# Altium PCB IR-Sensor.PcbDoc
Units mm, origin at the board's own origin, x right, y up, seen from the top; angles counter-clockwise.
Board outline 100 x 60 mm, 2 copper layers (Top Layer, Bottom Layer), stack 1.671 mm thick; 59 components, 34 nets, 161 pads, 262 vias.
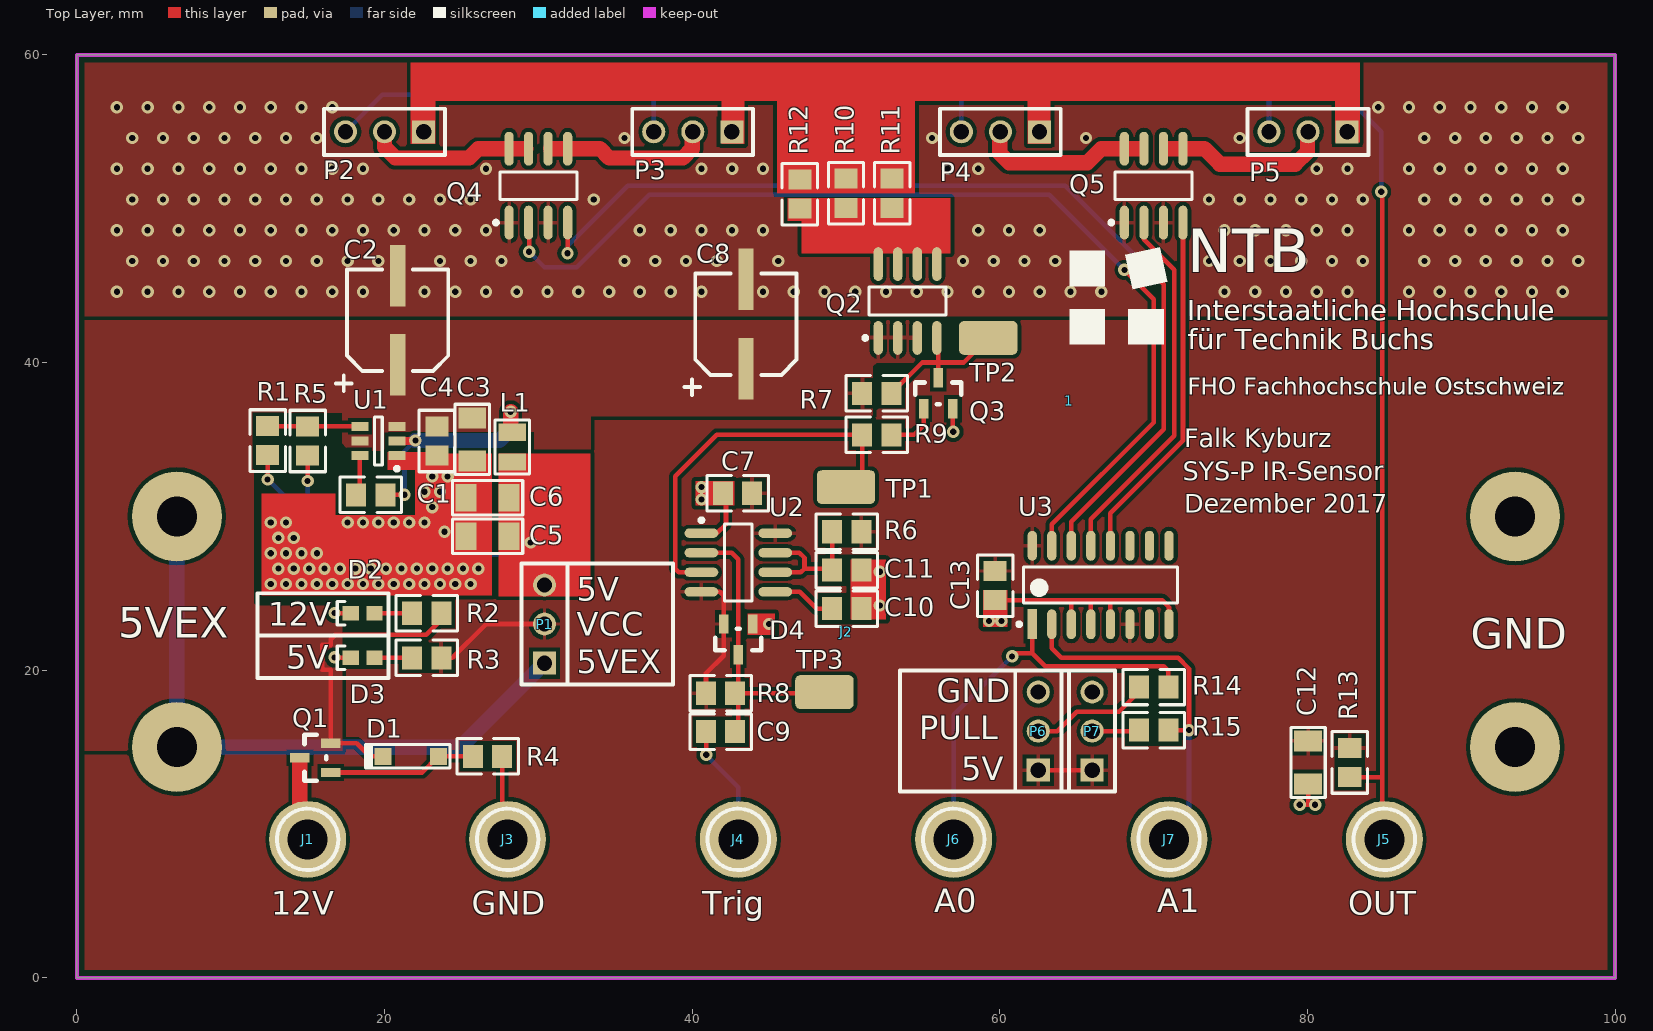
[diagram p0: Top Layer view]
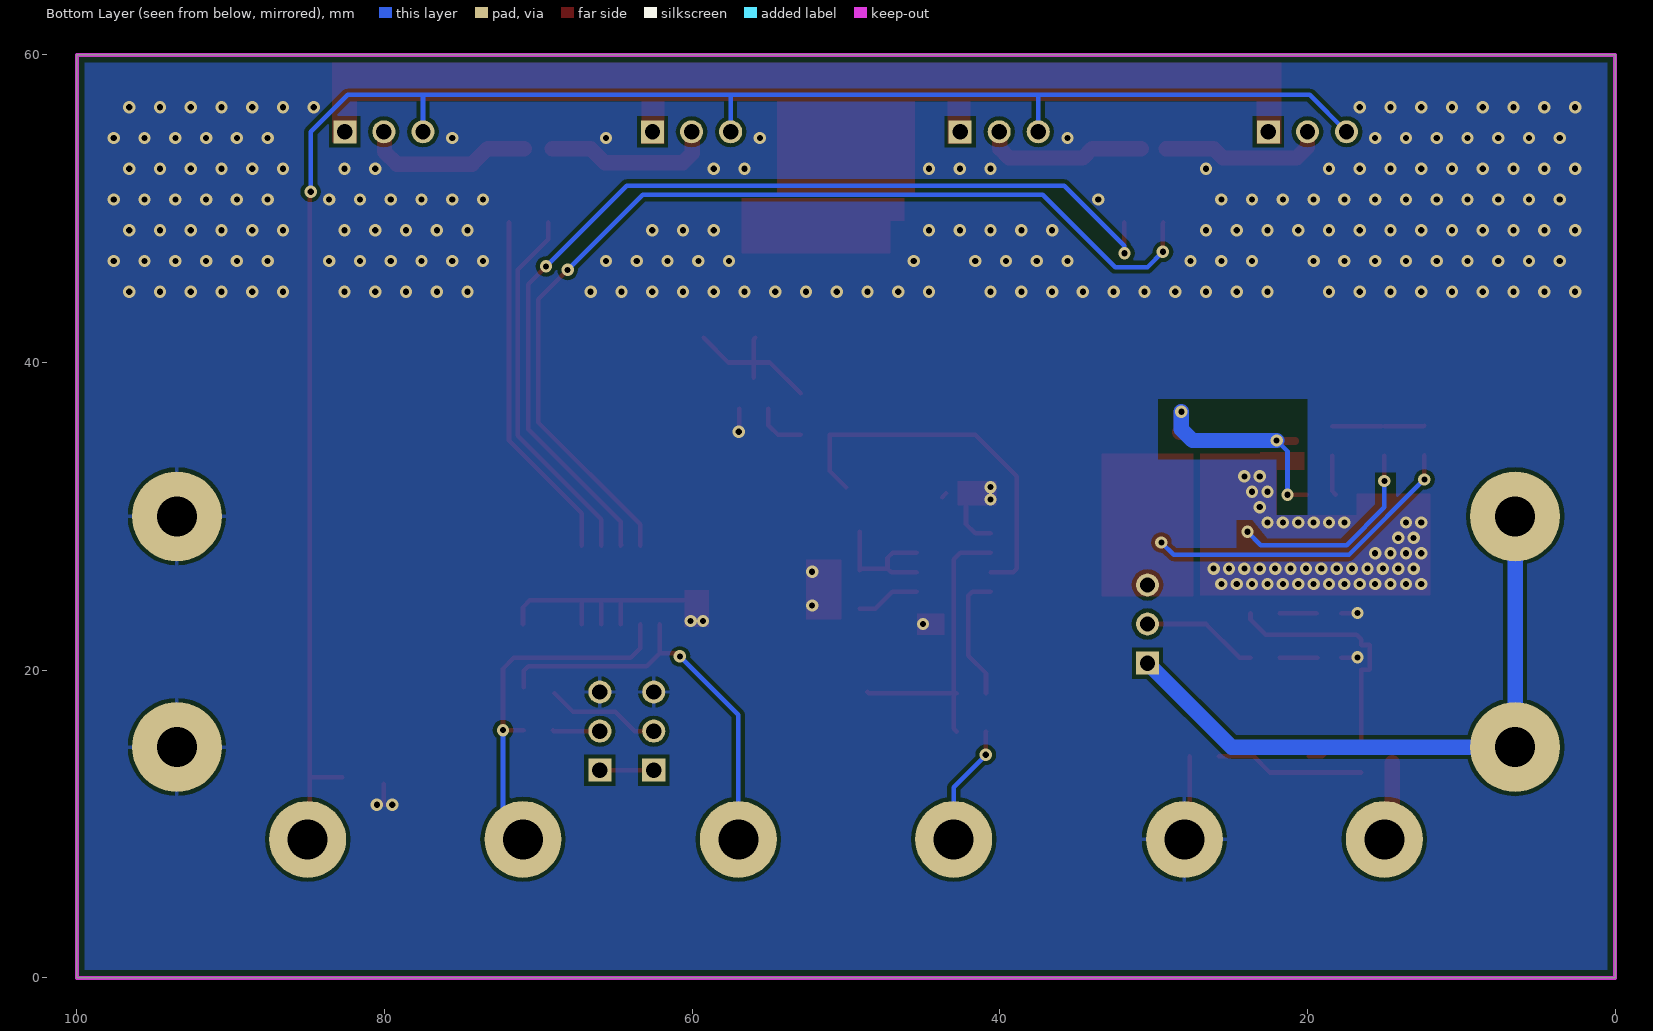
[diagram p1: Bottom Layer view, seen from below]
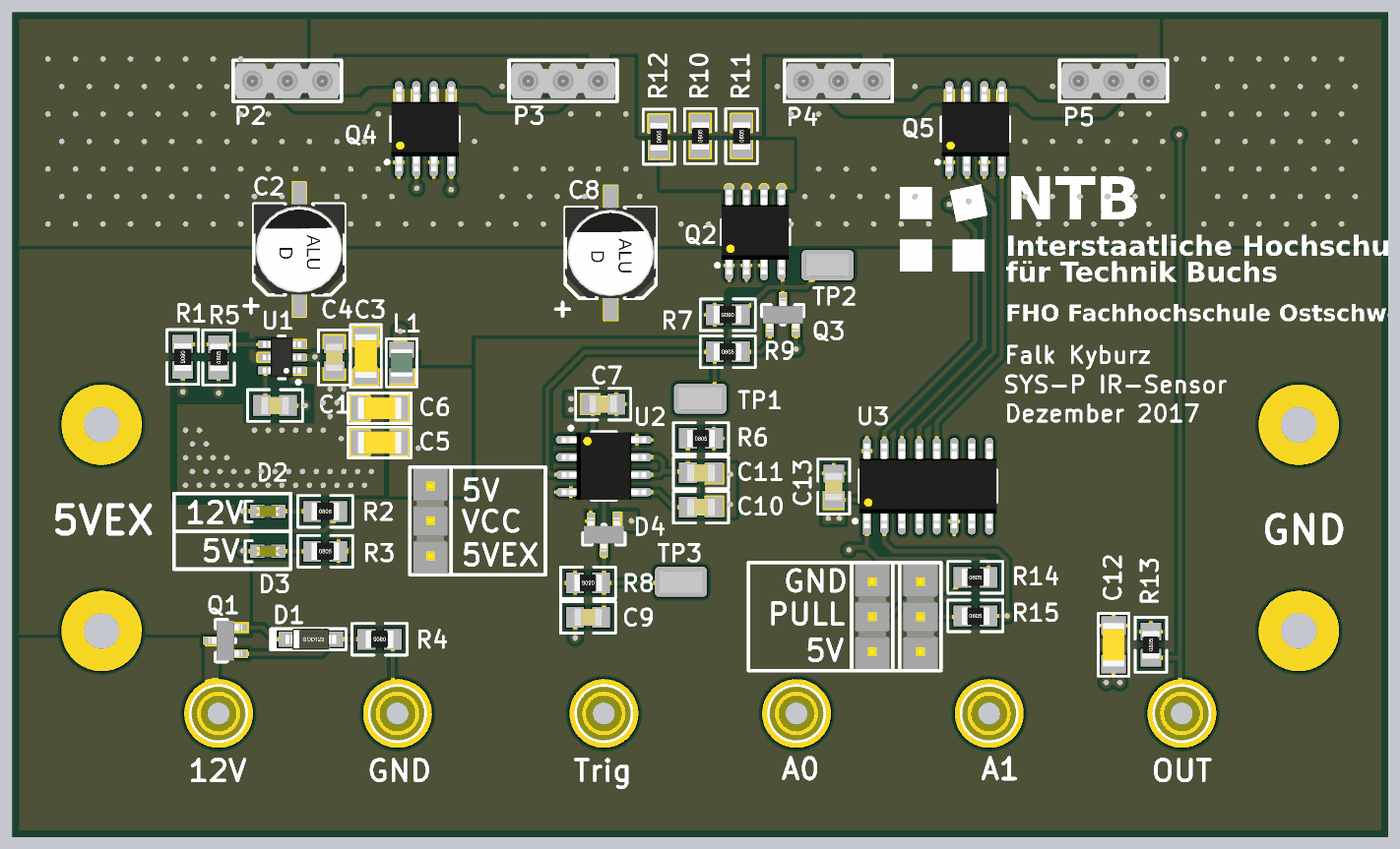
[diagram p2: 3D render of the assembled board from above, using the file's embedded part models]

## Layer stack, top to bottom
Top Solder: solder mask 0.0102, Solder Resist, Dk 3.5
Top Layer: signal copper 0.035
Dielectric1: core 1.6, FR-4, Dk 4.2
Bottom Layer: signal copper 0.0356
Bottom Solder: solder mask 0.0102, Solder Resist, Dk 3.5

## Board outline
0,0 100,0 100,60 0,60

## Design rules (kind name [scope] priority, off if disabled: settings)
BoardOutlineClearance [All] p1: gap=0.5 ignorepadtopadclearanceinfootprint=FALSE
Clearance PolygonMidLayer [InPolygon vs Not ( OnLayer('MidLayer1') OR OnLayer('MidLayer2')  )] p1: gap=0.254 ignorepadtopadclearanceinfootprint=FALSE except(0: Arc-Hole Track-Hole SMDPad-Hole THPad-Hole Via-Hole Fill-Hole Poly-Hole Region-Hole Text-Hole) // Polygon Clearance on the MidLayer
Clearance PolygonTopBottomLayer [InPolygon vs OnLayer('Top Layer') OR OnLayer('Bottom Layer')] p2: gap=0.254 ignorepadtopadclearanceinfootprint=FALSE except(0: Arc-Hole Track-Hole SMDPad-Hole THPad-Hole Via-Hole Fill-Hole Poly-Hole Region-Hole Text-Hole) // Polygon Clearance on the TopLayer and BottomLayer
Clearance [All] p3: gap=0.254 ignorepadtopadclearanceinfootprint=FALSE except(0: Arc-Hole Track-Hole SMDPad-Hole THPad-Hole Via-Hole Fill-Hole Poly-Hole Region-Hole Text-Hole)
ComponentClearance "Schematic Component Clearance Constraint" [InComponent('J2')] p1: gap=0 collisioncheckmode=3 verticalgap=0 showdistances=FALSE
ComponentClearance [All] p2: gap=0.254 collisioncheckmode=3 verticalgap=0.254 showdistances=FALSE
FabricationTestPointUsage TestPointUsage [All] p1 off: valid=0 allowmultiple=FALSE
FabricationTestpoint Testpoint [All] p1 off: side=3 testpointundercomponent=TRUE minsize=1.016 maxsize=2.54 preferedsize=1.524 minholesize=0 maxholesize=1.016 preferedholesize=0.813 testpointgrid=0.025 allowsidetop=TRUE allowsidebottom=TRUE usegrid=TRUE gridtolerance=0
FanoutControl Fanout_BGA [IsBGA] p1 off: bgadir=Out bgaviamode=Centered fanoutstyle=Auto fanoutdirection=Alternating viagrid=0.025 // Fanout_BGA (Default Rule)
FanoutControl Fanout_LCC [IsLCC] p2 off: bgadir=Out bgaviamode=Centered fanoutstyle=Auto fanoutdirection=Alternating viagrid=0.025 // Fanout_LCC (Default Rule)
FanoutControl Fanout_SOIC [IsSOIC] p3 off: bgadir=Out bgaviamode=Centered fanoutstyle=Auto fanoutdirection=Alternating viagrid=0.025 // Fanout_SOIC (Default Rule)
FanoutControl Fanout_Small [(CompPinCount < 5)] p4 off: bgadir=Out bgaviamode=Centered fanoutstyle=Auto fanoutdirection=OutThenIn viagrid=0.025 // Fanout_Small (Default Rule)
FanoutControl Fanout_Default [All] p5 off: bgadir=Out bgaviamode=Centered fanoutstyle=Auto fanoutdirection=Alternating viagrid=0.025 // Fanout_Default (Default Rule)
Height [All] p1 off: minheight=0 maxheight=25.4 prefheight=12.7
HoleSize HoleType [IsPad And HasSquareHole] p1: absolutevalues=TRUE maxlimit=0 minlimit=0 maxpercent=80.000 minpercent=20.000 // Find Square Holes
HoleSize [All] p2: absolutevalues=TRUE maxlimit=5 minlimit=0.4 maxpercent=80.000 minpercent=20.000
LayerPairs [All] p1 off: enforce=TRUE
MinimumAnnularRing "Minimum Annular Ring" [All] p1: minimumring=0.2
PolygonConnect Via [isVia] p1: connectstyle=Direct reliefconductorwidth=0.254 reliefentries=4 polygonreliefangle="90 Angle" airgapwidth=0.254
PolygonConnect PolygonConnect_Full [InComponentClass('Connect_Full')] p2: connectstyle=Direct reliefconductorwidth=0.254 reliefentries=4 polygonreliefangle="90 Angle" airgapwidth=0.254
PolygonConnect PolygonConnect_Full_Simple [InComponent('C3','C4')] p3: connectstyle=Direct reliefconductorwidth=0.254 reliefentries=4 polygonreliefangle="90 Angle" airgapwidth=0.254
PolygonConnect PolygonConnect_Relief [All] p4: connectstyle=Relief reliefconductorwidth=0.254 reliefentries=4 polygonreliefangle="90 Angle" airgapwidth=0.254
RoutingCorners [All] p1 off: cornerstyle=45-Degree minsetback=2.54 maxsetback=2.54
RoutingLayers [All] p1 off: top layer_v5=TRUE bottom layer_v5=TRUE
RoutingPriority [All] p1 off: routingpriority=0
RoutingTopology [All] p1 off: topology=Shortest
RoutingVias [All] p1: holewidth=0.4 width=0.8 viastyle="Through Hole" minholewidth=0.3 minwidth=0.7 maxholewidth=2 maxwidth=3.4
ShortCircuit [All] p1 off: allowed=FALSE
SignalStimulus "#Version Information" [All] p1 off: kind=1 level=0 starttime=10.00n stoptime=60.00n periodtime=100.00n // Version 1-1 from 2010-11-01
SilkToSolderMaskClearance SilkscreenOverComponentPads [IsPad] p1: minsilkscreentomaskgap=0.254 clearancetoexposedcopper=TRUE
SolderMaskExpansion [All] p1 off: expansion=0.1
Width [All] p1: maxlimit=2.54 minlimit=0.254 preferedwidth=0.254 minimp=50.000000 maximp=50.000000 favimp=50.000000
13 further rules are at their usual default settings.

## Classes and differential pairs
component class Connect_Full1: C3 C4
component class Connect_Full: C2 C5 C6 C8 L1 Q1 U1

## Components (designator, comment, footprint, x,y, rotation, side; value= is the part's Value field where it differs from the comment)
1 "NTB Logo Medium" "NTB Logo Medium" 64.5,37.5 r0 top
C1 "100nF" CAP-0805[2012] 19.1,31.4 r0 top
C2 "AVE476M16D16T-F" "CDE_CAP AVE CODE D_H" 20.85,42.75 r0 top value=47uF
C3 "10uF" CAP-1206[3216] 25.7,35 r270 top
C4 "100nF" CAP-0805[2012] 23.4,34.9 r270 top
C5 "22uF" CAP-1206[3216] 26.7,28.7 r180 top
C6 "22uF" CAP-1206[3216] 26.7,31.2 r180 top
C7 "100nF" CAP-0805[2012] 42.95,31.5 r180 top
C8 "AVE476M16D16T-F" "CDE_CAP AVE CODE D_H" 43.5,42.5 r0 top value=47uF
C9 "1nF" CAP-0805[2012] 41.85,16 r0 top
C10 "100nF" CAP-0805[2012] 50.05,24 r0 top
C11 "10nF" CAP-0805[2012] 50.05,26.5 r0 top
C12 "10uF" CAP-1206[3216] 80.04,14 r270 top
C13 "100nF" CAP-0805[2012] 59.7,25.5 r270 top
D1 "BZT52C4V7" SOD-123 21.7,14.4 r0 top
D2 "LTST-C190GKT" "LED 0603 green" 18.575,23.7 r0 top
D3 "LTST-C190GKT" "LED 0603 green" 18.575,20.8 r0 top
D4 "BAT721S" SOT-23 43,22 r0 top
J1 "12V" "Laborbuchse 2mm" 15,9 r0 top
J2 "ExpBoardSmall" EXPBOARDCON 6.5,30 r0 top locked
J3 "GND" "Laborbuchse 2mm" 28,9 r0 top
J4 "Trig" "Laborbuchse 2mm" 43,9 r0 top
J5 "OUT" "Laborbuchse 2mm" 85,9 r0 top
J6 "A0" "Laborbuchse 2mm" 57,9 r0 top
J7 "A1" "Laborbuchse 2mm" 71,9 r0 top
L1 "CKP2016 4R7M-T" IND-0806 28.3,34.5 r270 top
P1 "3 Pin Header" "3PIN HEADER 2.54MM" 30.4,20.48 r270 top
P2 "3 Pin Header Buchse" "3PIN HEADER SOCKET 2.54MM" 22.52,55 r0 top
P3 "3 Pin Header Buchse" "3PIN HEADER SOCKET 2.54MM" 42.56,55 r0 top
P4 "3 Pin Header Buchse" "3PIN HEADER SOCKET 2.54MM" 62.56,55 r0 top
P5 "3 Pin Header Buchse" "3PIN HEADER SOCKET 2.54MM" 82.56,55 r0 top
P6 "3 Pin Header" "3PIN HEADER 2.54MM" 62.5,13.52 r270 top
P7 "3 Pin Header" "3PIN HEADER 2.54MM" 66,13.52 r270 top
Q1 "STR1P2UH7" SOT-23 15.5,14.3 r270 top
Q2 "IRF7204PBF" SOIC-8 54,44 r90 top
Q3 "BC846B-7-F" SOT-23 56,38 r180 top
Q4 "IRF7311PBF" SOIC-8 30,51.5 r90 top
Q5 "IRF7311PBF" SOIC-8 70,51.5 r90 top
R1 "56k" RES-0805[2012] 12.4,34.929 r270 top
R2 "TBD" RES-0805[2012] 22.75,23.7 r0 top
R3 "TBD" RES-0805[2012] 22.75,20.8 r0 top
R4 "10k" RES-0805[2012] 26.7,14.4 r180 top
R5 "10k" RES-0805[2012] 15,34.9 r90 top
R6 "16k" RES-0805[2012] 50.05,29 r0 top
R7 "1k" RES-0805[2012] 52,38 r180 top
R8 "4k3" RES-0805[2012] 41.85,18.5 r180 top
R9 "10k" RES-0805[2012] 52,35.3 r0 top
R10 "10R 1% 0805(2012)" RES-0805[2012] 50,51 r90 top value=33R
R11 "10R 1% 0805(2012)" RES-0805[2012] 53,51 r90 top value=33R
R12 "10R 1% 0805(2012)" RES-0805[2012] 47,50.95 r90 top value=33R
R13 "510R" RES-0805[2012] 82.75,14 r90 top
R14 "10k" RES-0805[2012] 70,18.9 r0 top
R15 "10k" RES-0805[2012] 70,16.1 r0 top
TP1 "Testpoint SMD 1206" TP-SMD-1206 50,31.9 r0 top
TP2 "Testpoint SMD 1206" TP-SMD-1206 59.25,41.6 r0 top
TP3 "Testpoint SMD 1206" TP-SMD-1206 48.6,18.58 r180 top
U1 "TPS562209" SOT-23-6 19.6,34.9 r180 top
U2 "ICM7555" SOIC-8 43,27 r0 top
U3 "74HC237D,653" SOIC-16 66.553,25.538 r90 top

## Footprints (in the part's own frame and the unit in brackets; to place one, negate y for a bottom-side part, rotate by r counter-clockwise, add the part's x,y. Pads: shape width x height; smd on the part's side, far side on the other; paste and mask are expansions set on the pad)
"3PIN HEADER 2.54MM" [mm]
  rect 1.5x1.5 hole 1 paste-0.002 mask+0.07: 1(0.02,0)
  round 1.5 hole 1 paste-0.002 mask+0.07: 2(-2.52,0) 3(-5.06,0)
  silkscreen extent -6.46,-1.5 1.4,1.5, body extent -6.33,-1.24 1.29,1.24, height 8.38
"3PIN HEADER SOCKET 2.54MM" [mm]
  rect 1.5x1.5 hole 1 paste-0.002 mask+0.07: 1(0.02,0)
  round 1.5 hole 1 paste-0.002 mask+0.07: 2(-2.52,0) 3(-5.06,0)
  silkscreen extent -6.46,-1.5 1.4,1.5, body extent -6.33,-1.27 1.29,1.27, height 3.8
CAP-0805[2012] [mm]
  rect 1.3x1.5 smd: 1(-0.95,0) 2(0.95,0)
  silkscreen extent -2,-1.15 2,1.15, body extent -1,-0.62 1,0.63, height 0.6
CAP-1206[3216] [mm]
  rect 1.35x1.8 smd: 1(-1.4,0) 2(1.4,0)
  silkscreen extent -2.29,-1.12 2.29,1.12, body extent -1.6,-0.8 1.6,0.8, height 1.8
"CDE_CAP AVE CODE D_H" [mm]
  rect 1x4 smd paste-0.002 mask+0.07: 1(0,-2.9) 2(0,2.9)
  silkscreen extent -4,-4.6 3.29,3.3, body extent -3.31,-3.5 3.29,3.5
EXPBOARDCON [mm]
  round 5.842 hole 2.6: 1(0,0) 2(0,-15) 3(87,-15) 4(87,0)
  Keep-Out Layer lines w0.254: -6.5,-30 -6.5,30 93.5,30 93.5,-30 -6.5,-30
IND-0806 [mm]
  rect 1.13x1.8 smd: 1(-0.965,0) 2(0.965,0)
  silkscreen extent -1.75,-1.12 1.75,1.12, body extent -1,-0.8 1,0.8, height 1
"Laborbuchse 2mm" [mm]
  round 5 hole 2.6: 1(0,0)
  silkscreen extent -2,-2 2,2, body extent -2.01,-2.01 2,2.01, height 0.5
"LED 0603 green" [mm]
  rect 1.05x0.95 smd: 1(-0.775,0) 2(0.775,0)
  silkscreen extent -1.65,-0.76 -1.14,0.76, body extent -0.81,-0.4 0.81,0.4, height 0.6
"NTB Logo Medium" [mm]
  silkscreen extent 0.02,3.66 6.39,10
RES-0805[2012] [mm]
  rect 1.3x1.5 smd: 1(-0.95,0) 2(0.95,0)
  silkscreen extent -2,-1.15 2,1.15, body extent -1,-0.62 1,0.63, height 0.6
SOD-123 [mm] "SOD-123, 2 leads, plastic surface-mounted package"
  rect 1.1x1.1 smd: 1(-1.8,0) 2(1.8,0)
  silkscreen extent -2.92,-0.76 2.57,0.76, body extent -1.85,-0.77 1.85,0.78, height 1.35
SOIC-8 [mm]
  oval 2.2x0.6 smd: 1(-2.4,1.905) 2(-2.4,0.635) 3(-2.4,-0.635) 4(-2.4,-1.905) 5(2.4,-1.905) 6(2.4,-0.635) 7(2.4,0.635) 8(2.4,1.905)
  silkscreen extent -2.52,-2.5 0.9,2.88, body extent -3.07,-2.44 3.07,2.45, height 1.76
SOIC-16 [mm]
  rect 1.95x0.6 smd: 1(-2.55,4.445)
  oval 1.95x0.6 smd: 2(-2.55,3.175) 3(-2.55,1.905) 4(-2.55,0.635) 5(-2.55,-0.635) 6(-2.55,-1.905) 7(-2.55,-3.175) 8(-2.55,-4.445) 9(2.55,-4.445) 10(2.55,-3.175) 11(2.55,-1.905) 12(2.55,-0.635) 13(2.55,0.635) 14(2.55,1.905) 15(2.55,3.175) 16(2.55,4.445)
  silkscreen extent -2.67,-5 1.18,5.42, body extent -3.07,-4.98 3.07,4.98, height 1.73
SOT-23 [mm]
  rect 0.61x1.26 smd paste-0.05: 1(0.95,1) 2(-0.95,1) 3(0,-1)
  silkscreen extent -1.5,-0.7 1.5,0.7, body extent -1.45,-1.21 1.45,1.21, height 0.98
SOT-23-6 [mm]
  rect 1.1x0.6 smd: 1(-1.2,0.95) 2(-1.2,0) 3(-1.2,-0.95) 4(1.2,-0.95) 5(1.2,0) 6(1.2,0.95)
  silkscreen extent -1.33,-1.55 0.25,1.92, body extent -1.4,-1.45 1.4,1.45, height 1.45
TP-SMD-1206 [mm]
  rrect30% 3.8x2.2 smd: 1(0,0)
  body extent -1.6,-0.81 1.6,0.81, height 2.22

## Part data
C1 C4 C7 C10 C13: library part "MLCC 0805 100n 50V", "100n 50V X7R MLCC 0805 (1608 Metric)", Case-EIA=0803, Case-Metric=2013, Rated Voltage=50V, Temperature Characteristics EIA=X7R, Temperature Range EIA=-55C/+125C, Tolerance=10%, ValAddon="50V, 10%"
  C4: ClassName=Connect_Full1
C2 C8: library part "ELKO 47uF 16V", "ELKO, 47uF, 16V, CDE_AVE476M16D16T-F_AVE CODE D", Distributor PartNr=598-AVE476M16D16T-F, Manufacturer="Cornell Dubilier", ValueAddon="16V ±20 %", #Class=PASSIVE, #ClassSub=CAPACITOR, ClassName=Connect_Full, ComponentLink1Description="Manufacturer Link", ComponentLink2Description=Datasheet, ComponentLink2URL=http://www.cde.com/catalogs/AVE.pdf, ComponentLink3Description="Packaging Specification", Distributor=Mouser, Manufacturer PartNr=AVE476M16D16T-F, Published=20121220, Publisher="Stefan Ursella, M.Eng", RefFootprint="CDE_CAP AVE CODE D", RefSchema="CDE_AVE476M16D16T-F_AVE CODE D"
C3 C12: library part "MLCC 1206 10u 16V", "10u 16V X7R MLCC 1206 (3016 Metric)", Case-EIA=1206, Case-Metric=3216, Rated Voltage=10V, Temperature Characteristics EIA=X7R, Temperature Range EIA=-55C/+125C, Tolerance=10%, ValAddon="16V, 10%"
  C3: ClassName=Connect_Full1
C5 C6: library part "MLCC 1206 22u 10V", "22u 10V X7R MLCC 1206 (3016 Metric)", Case-EIA=1206, Case-Metric=3216, Rated Voltage=10V, Temperature Characteristics EIA=X7R, Temperature Range EIA=-55C/+125C, Tolerance=10%, ClassName=Connect_Full, ValAddon="10V, 10%"
C9: library part "MLCC 0805 1n 16V", "MLCC - SMD/SMT 0805 1000pF 16V C0G 10%", Manufacturer=Vishay, Manufacturer PartNr=VJ0805A102KXJPW1BC, Supplier Part Number 1=77-VJ0805A102KXJPBC, ValueAddon="16V, 10%", ComponentLink1Description="Manufacturer Link", ComponentLink1URL=http://www.vishay.com/product?docid=28548, ComponentLink2Description=Datasheet, ComponentLink2URL=http://www.vishay.com/docs/28548/vjw1bcbascomseries.pdf, Published=18.12.14, Publisher=SCLM, RefFootprint=Gen_0805_H, RefSchema=Cap_1nF, Status=Lager?, Supplier 1=Mouser
C11: library part "MLCC 0805 10n 16V", "10n 16V X7R MLCC 0805", Manufacturer=AVX, Manufacturer PartNr=0805YC103KAT2A, ValueAddon="16V, 10%", ComponentLink1Description="Manufacturer Link", ComponentLink1URL=http://www.avx.com/prodinfo_productdetail.asp?I=45&K=search&C=&word=0805YC103KAT2A&form=number&Number=, ComponentLink2Description=Datasheet, ComponentLink2URL=http://www.farnell.com/datasheets/1679506.pdf, Published=09.01.15, Publisher=SCLM, Status=LAger?
D1: "4.7V Zener-Diode, BZT52C4V7", Forward Current="1.5 A", Forward Voltage=1.25V, Reverse Voltage=600V, ComponentLink1Description="Datasheet RF2L6S", ComponentLink1URL=V:\Diodes\RHOM_RF2L6S.pdf
D2 D3: library part "LED Green", "LED SMD 0603 green 6mcd", Color=green, Forward Current=30mA, Forward Voltage=2.1V, ComponentLink1Description="Datasheet LTST-C190GKT", ComponentLink1URL=V:\Diodes\Lite-On-LTST-C190GKT.pdf, Spectrum=565nm
D4: library part BAT721S-SOT23, "NXP  BAT721S  SCHOTTKY-DIODE, 2FACH", Distributor PartNr=1081200, Manufacturer=NXP, ComponentLink1Description="Manufacturer Link", ComponentLink1URL=http://www.nxp.com/search?q=%09bat721s&type=keyword&rows=10, ComponentLink2Description=Datasheet, ComponentLink2URL=http://www.farnell.com/datasheets/453891.pdf, ComponentLink3Description="Packaging Specification", Distributor=Farnell, Manufacturer PartNr=BAT721S, Published=20150612, Publisher=SCNP, RefFootprint="CDE_CAP AVE CODE D", RefSchema="CDE_AVE476M16D16T-F_AVE CODE D"
J1 J3 J4 J5 J6 J7: library part Laborbuchse, "Laborbuchse", #Class=Connector, #ClassSub=Laborbuchse, Published=2008-12-16, Publisher="B.Sc. Ursella", RefFootprint="Laborbuchse 2mm", RefSchema=Laborbuchse, Size=2mm, Status=nLager
L1: library part "L 4.7u", "MULTILAYER CHIP POWER INDUCTORS", Current Rating=900mA, Inductance=4u7, Manufactor="Taiyo Yuden", ClassName=Connect_Full, ComponentLink1Description="Datasheet Taiyo Yuden CK Series", ComponentLink1URL=V:\Inductor\Taiyo_Yuden_CK_Series.pdf, DCR=160mOhm
P1 P6 P7: "3 Pin Header 2.54mm", ComponentLink1Description="Manufacturer Link", ComponentLink2Description=Datasheet, Published=16.12.2014, Publisher=SCLM, RefFootprint=GEN_Buchsenleiste-2.54MM_3, RefSchema=Gen_Buchsenleiste_3-Pin, Status=Lager?
P2 P3 P4 P5: "3 Pin Header 2.54mm Buchse", ComponentLink1Description="Manufacturer Link"
Q1: "Low Power P-Kanal Mosfet", Manufacturer="ST Microelectronics", ClassName=Connect_Full, ComponentLink1Description="Manufacturer Link", ComponentLink2Description=Datasheet, Rdson=100mOhm, Vde=30
Q2: library part IRF7204, "High Power P-Kanal Mosfet", Manufacturer="International Rectifiers", Supplier Part Number 1=9103350, ComponentLink1Description="Manufacturer Link", ComponentLink1URL=http://www.irf.com/, ComponentLink2Description=Datasheet, ComponentLink2URL=http://www.irf.com/product-info/datasheets/data/irf7204.pdf, Manufacturer PartNr=IRF7204PBF, Published=8-Jun-2000, Publisher="Altium Limited", RefFootprint=IRF_SO8_H, RefSchema=IRF_IRF7204_SO-8, Status=nLager, Supplier 1=Farnell
Q3: library part BC846B-SOT23, "NPN General-purpose Transistor", Distributor PartNr=1773617, Manufacturer="DIODES INC", #Class=SEMICONDUCTOR-TRANSISTOR, #ClassSub=BJT-NPN, ComponentLink1Description="Manufacturer Link", ComponentLink1URL=http://www.diodes.com/products/catalog/detail.php?item-id=6689&popup=datasheet, ComponentLink2Description=Datasheet, ComponentLink2URL=http://www.diodes.com/datasheets/ds11108.pdf, ComponentLink3Description="Packaging Specification", ComponentLink3URL=http://www.diodes.com/datasheets/ap02001.pdf, Distributor=Farnell, Manufacturer PartNr=BC846B-7-F, Published=17-Sep-2003, Publisher="Altium Limited", RefFootprint=DIODS_SOT23_1B2E3C_3_H, RefSchema=DIODS_BC846B-7-F_SOT23, Status=nLager
Q4 Q5: library part IRF7311, "Dual N-Kanal Mosfet", Manufacturer="International Rectifier", Supplier Part Number 1=1013364, ComponentLink1Description="Manufacturer Link", ComponentLink1URL=http://www.irf.com/, ComponentLink2Description=Datasheet, ComponentLink2URL=http://www.irf.com/product-info/datasheets/data/irf7311.pdf, Manufacturer PartNr=IRF7311PBF, Published=8-Jun-2000, Publisher="Altium Limited", RefFootprint=IRF_SO8_H, RefSchema=IRF_IRF7311_SO-8, Status=nLager, Supplier 1=Farnell
R1 R2 R3 R4 R5 R6 R7 R8 R9 R13 R14 R15: library part "RES 0805", "0805 (2013 Metric) 1/10 W 10K 1 Thick Film Chip Resistor", Case-EIA=0805, Case-Metric=2013, Power="1/10 W", Temp. Coefficent=±100ppm, Tolerance=1%, Technology=SMT
R10 R11 R12: library part PassResBas0805-00750-A.1, "1R8 0.125W 1% 0805 (2012 Metric)  SMD", Supplier Part Number 1=2141642, ValueAddon="1% 0.125W", #Class=Passiv-Components, #SubClass="Resistor SMD", ComponentLink1Description="Manufacturer Link", ComponentLink2Description=Datasheet, ComponentLink3Description="Packaging Specification", RefFileFOO=SMD-Chip-generic, RefFileSCH=Symbols-generic, RefSchema=R, Status=nLager, Supplier 1=Farnell
TP1 TP2 TP3: "Testpoint xSmall", Type="Standard (No BOM)"
U1: library part TPS562209-SOT23-6, "3-A Synchronous Step-Down Voltage Regulator", Manufactor="Texas Instruments", ClassName=Connect_Full, ComponentLink1Description="Datasheet TPS56x209", ComponentLink1URL=V:\Power_Management_ICs\PWM_Cont\TPS56x209.pdf, Order Nr.=TPS562209DDCR
U2: library part ICM7555-SOIC8, "General purpose CMOS timer", Manufacturer="National Semiconductor", Supplier Part Number 1=771-ICM7555, #Class=Analog, #SubClass="Timer Circuit", ComponentLink1Description=Datasheet, ComponentLink1URL=http://www.datasheetcatalog.org/datasheet/intersil/fn2867.pdf, ComponentLink2Description=Distributor, ComponentLink2URL=https://www.distrelec.ch/ishopWebFront/catalog/product.do/para/node/is/acaaabaaacaf/and/highlightNode/is/640145/and/id/is/01/and/series/is/1.html, Manufacturer PartNr=ICM7555, Published=15/04/2002, Publisher="Altium Hobart Technology Centre", RefFootprint=NXP_SO8(SOT96-1)_H, RefSchema=NXP_ICM7555_SO-8, Status=nLager, Supplier 1="Mouser Electronics"
U3: library part 74HC237D-SOIC16, "3-to-8 line decoder, demultiplexer, NXP, SO16", Manufacturer=NXP, Supplier Part Number 1=771-HC237D653, ComponentLink1Description="Manufacturer Link", ComponentLink1URL=http://www.nxp.com/products/logic/decoders_demultiplexers/74HC237D.html, ComponentLink2Description=Datasheet, ComponentLink2URL=http://www.nxp.com/documents/data_sheet/74HC237.pdf, Manufacturer PartNr=74HC237D,653, Published=28.11.2014, Publisher=SCLM, RefFootprint=NXP_SO16(SOT109-1)_H, RefSchema=NXP_74HC237D_SO-16, Status=nLager, Supplier 1="Mouser Electronics"

## Via types
v1: diameter 0.8, hole 0.4, Top Layer to Bottom Layer, tented both sides, 262 vias

## Nets (pads, with @x,y where several pads share a name; then routed paths per layer and width w, separated by ;. In a path a pad name is that pad's centre, name@x,y a point inside that pad or via, vN(x,y) a via of type N, cw(c..) or ccw(c..) an arc to the next point about the centre after c; other vN are vias at no path point)
5V: C7.1 C12.1 C13.1 D4.2 P1.2 P6.1 P7.1 R3.2 R6.2 R8.2 R13.2 U2.4 U2.8 U3.6 U3.16 | length 19.8
  Top Layer w0.3: R3.2 24.4,20.8 26.6,23 P1.2 ; U2.4 41.805,25.095 42.05,24.85 D4.2 42.05,20.95 40.9,19.8 R8.2 ; C7.1@43.5,31.5 C7.1@43.75,31.25 ; P6.1 P7.1
5VEX: J2.1 J2.2 P1.1 | length 41.2
  Bottom Layer w1: J2.1 J2.2 24.94,15 P1.1
12V: C2.1 C3.1 C4.1 C8.1 D1.1 Q1.2 Q2.1 Q2.2 Q2.3 R2.2 R7.2 U1.3 U1.5 | length 19.8
  Top Layer w0.3: D1.1 19.05,14.4 18.2,15.25 Q1.2 16.5,20.028 15.946,20.028 15.946,21.636 16.5,21.636 16.5,22 16.8,22.3 22.712,22.3 23.7,23.288 R2.2
GND: C2.2 C3.2 C4.2 C5.2 C6.2 C7.2 C8.2 C10.2 C11.2 C12.2 C13.2 D2.1 D3.1 D4.1 J2.3 J2.4 J3.1 P6.3 P7.3 Q3.2 Q4.1 Q4.3 Q5.1 Q5.3 R4.1 R5.1 U1.1 U2.1 U3.3 U3.4 U3.5 U3.8 | length 47.7
  Top Layer w0.3: v1(15,32.3) R5.1 ; v1(16.75,23.716) 16.75,23.7 D2.1 ; v1@17.054,20.8 D3.1 ; v1(23.9,29) 25,29 C5.2 ; R4.1 27.65,9.35 J3.1 ; U2.1 41.605,28.905 42.2,29.5 42.2,31.3 C7.2 ; Q3.2 56.95,35.5 v1(56.972,35.5) ; C13.2 64.6,24.55 ; U3.3 64.648,24.502 64.6,24.55 ; U3.4 65.918,24.532 65.9,24.55 ; U3.5 67.188,24.488 67.25,24.55 ; U3.8 70.998,24.102 70.55,24.55 67.25,24.55 ; v1(79.5,11.25) 80.04,11.25 ; C12.2 80.04,11.25 ; v1(80.5,11.25) 80.04,11.25 ; 64.6,24.55 65.9,24.55 ; 65.9,24.55 67.25,24.55
  Bottom Layer w0.3: v1(15,32.3) 15,30.583 17.455,28.128 23.028,28.128 v1(23.9,29)
  other v1: 16.75,20.832 45,23 59.3,23.2 60.1,23.2 52.2,24.2 12.6,25.6 13.6,25.6 14.6,25.6 15.6,25.6 16.6,25.6 17.6,25.6 18.6,25.6 19.6,25.6 20.6,25.6 21.6,25.6 22.6,25.6 23.6,25.6 24.6,25.6 25.6,25.6 52.2,26.4 13.1,26.6 14.1,26.6 15.1,26.6 16.1,26.6 17.1,26.6 18.1,26.6 19.1,26.6 20.1,26.6 21.1,26.6 22.1,26.6 23.1,26.6 24.1,26.6 25.1,26.6 26.1,26.6 12.6,27.6 13.6,27.6 14.6,27.6 15.6,27.6 13.1,28.6 14.1,28.6 12.6,29.6 13.6,29.6 17.6,29.6 18.6,29.6 19.6,29.6 20.6,29.6 21.6,29.6 22.6,29.6 23.1,30.6 40.6,31.1 22.6,31.6 23.6,31.6 40.6,31.9 23.1,32.6 24.1,32.6 2.6,44.6 4.6,44.6 6.6,44.6 8.6,44.6 10.6,44.6 12.6,44.6 14.6,44.6 16.6,44.6 18.6,44.6 22.6,44.6 24.6,44.6 26.6,44.6 28.6,44.6 30.6,44.6 32.6,44.6 34.6,44.6 36.6,44.6 38.6,44.6 40.6,44.6 44.6,44.6 46.6,44.6 48.6,44.6 50.6,44.6 52.6,44.6 54.6,44.6 56.6,44.6 58.6,44.6 60.6,44.6 62.6,44.6 64.6,44.6 66.6,44.6 74.6,44.6 76.6,44.6 78.6,44.6 80.6,44.6 82.6,44.6 86.6,44.6 88.6,44.6 90.6,44.6 92.6,44.6 94.6,44.6 96.6,44.6 3.6,46.6 5.6,46.6 7.6,46.6 9.6,46.6 11.6,46.6 13.6,46.6 15.6,46.6 17.6,46.6 19.6,46.6 23.6,46.6 25.6,46.6 27.6,46.6 35.6,46.6 37.6,46.6 39.6,46.6 41.6,46.6 45.6,46.6 57.6,46.6 59.6,46.6 61.6,46.6 63.6,46.6 65.6,46.6 73.6,46.6 75.6,46.6 77.6,46.6 79.6,46.6 81.6,46.6 83.6,46.6 87.6,46.6 89.6,46.6 91.6,46.6 93.6,46.6 95.6,46.6 97.6,46.6 2.6,48.6 4.6,48.6 6.6,48.6 8.6,48.6 10.6,48.6 12.6,48.6 14.6,48.6 16.6,48.6 18.6,48.6 20.6,48.6 22.6,48.6 24.6,48.6 26.6,48.6 36.6,48.6 38.6,48.6 40.6,48.6 42.6,48.6 44.6,48.6 58.6,48.6 60.6,48.6 62.6,48.6 74.6,48.6 76.6,48.6 78.6,48.6 80.6,48.6 82.6,48.6 86.6,48.6 88.6,48.6 90.6,48.6 92.6,48.6 94.6,48.6 96.6,48.6 3.6,50.6 5.6,50.6 7.6,50.6 9.6,50.6 11.6,50.6 13.6,50.6 15.6,50.6 17.6,50.6 19.6,50.6 21.6,50.6 23.6,50.6 25.6,50.6 33.6,50.6 73.6,50.6 75.6,50.6 77.6,50.6 79.6,50.6 81.6,50.6 83.6,50.6 87.6,50.6 89.6,50.6 91.6,50.6 93.6,50.6 95.6,50.6 97.6,50.6 2.6,52.6 4.6,52.6 6.6,52.6 8.6,52.6 10.6,52.6 12.6,52.6 14.6,52.6 16.6,52.6 18.6,52.6 26.6,52.6 40.6,52.6 42.6,52.6 44.6,52.6 56.6,52.6 58.6,52.6 80.6,52.6 82.6,52.6 86.6,52.6 88.6,52.6 90.6,52.6 92.6,52.6 94.6,52.6 96.6,52.6 3.6,54.6 5.6,54.6 7.6,54.6 9.6,54.6 11.6,54.6 13.6,54.6 15.6,54.6 35.6,54.6 55.6,54.6 65.6,54.6 75.6,54.6 87.6,54.6 89.6,54.6 91.6,54.6 93.6,54.6 95.6,54.6 97.6,54.6 2.6,56.6 4.6,56.6 6.6,56.6 8.6,56.6 10.6,56.6 12.6,56.6 14.6,56.6 16.6,56.6 84.6,56.6 86.6,56.6 88.6,56.6 90.6,56.6 92.6,56.6 94.6,56.6 96.6,56.6
NetC1_1: C1.1 U1.6 | length 2.7
  Top Layer w0.3: C1.1 18.4,31.65 U1.6
NetC1_2: C1.2 L1.1 U1.2 | length 15.3
  Top Layer w0.3: C1.2 v1(21.3,31.4)
  Top Layer w0.5: U1.2 21.975,34.9 v1(22.004,34.929)
  Top Layer w1: v1(28.2,36.8) 28.2,35.565 L1.1
  Bottom Layer w0.3: v1(21.3,31.4) 21.3,34.225 v1(22.004,34.929)
  Bottom Layer w1: v1(22.004,34.929) 27.471,34.929 28.2,35.658 v1(28.2,36.8)
NetC5_1: C5.1 C6.1 L1.2 P1.3 R1.2 | length 21
  Top Layer w0.3: v1(12.4,32.4) R1.2
  Bottom Layer w0.3: v1(12.4,32.4) 17.3,27.5 28.7,27.5 v1(29.5,28.3)
NetC9_1: C9.1 J4.1 | length 7.9
  Top Layer w0.3: C9.1 40.916,15.984 v1(40.916,14.5)
  Bottom Layer w0.3: v1(40.916,14.5) 40.916,14.468 43,12.384 J4.1
NetC9_2: C9.2 D4.3 R8.1 TP3.1 U2.2 | length 19.7
  Top Layer w0.3: U2.2 42.565,27.635 43,27.2 D4.3 R8.1@43,18.5 ; C9.2 43,16.2 R8.1@43,18.5 ; R8.1 R8.1@43,18.5 ; TP3.1 48.52,18.5 R8.1@43,18.5
NetC10_1: C10.1 U2.5 | length 4.2
  Top Layer w0.3: U2.5 47.005,25.095 48.1,24 C10.1
NetC11_1: C11.1 R6.1 U2.6 U2.7 | length 9.1
  Top Layer w0.3: U2.6 47.065,26.365 47.3,26.6 ; U2.7 46.965,27.635 47.3,27.3 47.3,26.6 ; R6.1 C11.1 49,26.6 47.3,26.6
NetD1_2: D1.2 Q1.1 R4.2 | length 9.7
  Top Layer w0.3: Q1.1 22.45,13.35 D1.2 R4.2
NetD2_2: D2.2 R2.1 | length 2.4
  Top Layer w0.3: D2.2@19.4,23.7 R2.1
NetD3_2: D3.2 R3.1 | length 2.5
  Top Layer w0.3: D3.2 R3.1
NetJ1_1: J1.1 Q1.3 | length 5.2
  Top Layer w1: Q1.3@14.5,14 14.5,10.5 15,10 J1.1
NetJ5_1: J5.1 P2.3 P3.3 P4.3 P5.3 R13.1 | length 124.8
  Top Layer w0.3: R13.1 84.8,13.05 84.85,13 ; v1(84.8,51.1) 84.85,51.05 84.85,13 ; J5.1 84.85,9.15 84.85,13
  Bottom Layer w0.3: P2.3 19.86,57.4 37.5,57.4 ; P3.3 37.5,57.4 ; P4.3 57.5,57.4 ; P5.3 77.5,57.3 77.6,57.4 ; v1(84.8,51.1) 84.8,55 82.4,57.4 77.6,57.4 ; 37.5,57.4 57.5,57.4 ; 57.5,57.4 77.6,57.4
NetJ6_1: J6.1 R14.2 U3.1 | length 27.1
  Top Layer w0.3: v1(60.8,20.9) 60.992,21.092 62.108,21.092 ; U3.1 62.108,21.092 ; R14.2 70.95,19.95 70.654,20.246 62.954,20.246 62.108,21.092
  Bottom Layer w0.3: J6.1 57,17.1 v1(60.8,20.9)
NetJ7_1: J7.1 R15.2 U3.2 | length 25.9
  Top Layer w0.3: U3.2 63.378,21.422 64,20.8 71.6,20.8 72.3,20.1 v1(72.3,16.1) R15.2 ; J7.1 J7.1@72.3,10.3
  Bottom Layer w0.3: J7.1 72.3,10.3 v1(72.3,16.1)
NetP2_1: P2.1 P3.1 P4.1 P5.1 R10.2 R11.2 R12.2
NetP2_2: P2.2 Q4.7 Q4.8 | length 10.7
  Top Layer w1: P2.2 20,54 20.7,53.3 25.5,53.3 26.1,53.9 Q4.8 Q4.7@29.2,53.9
NetP3_2: P3.2 Q4.5 Q4.6 | length 10.8
  Top Layer w1: Q4.6@30.8,53.9 Q4.5 34,53.9 34.6,53.3 39.4,53.3 40,53.9 P3.2@40,55
NetP4_2: P4.2 Q5.7 Q5.8 | length 11.1
  Top Layer w1: P4.2@60,55 60,53.6 60.6,53 65.7,53 66.6,53.9 Q5.8 Q5.7@69.1,53.9
NetP5_2: P5.2 Q5.5 Q5.6 | length 11.1
  Top Layer w1: Q5.6@70.9,53.9 Q5.5 73.3,53.9 74.3,52.9 79.2,52.9 80,53.7 P5.2@80,55
NetP6_2: P6.2 R14.1 | length 7.5
  Top Layer w0.3: P6.2 63.74,16.04 65,17.3 67.75,17.3 R14.1@68.95,18.5
NetP7_2: P7.2 R15.1 | length 3.1
  Top Layer w0.3: P7.2 68.99,16.04 R15.1
NetQ2_4: Q2.4 Q3.3 R7.1 TP2.1 | length 10.4
  Top Layer w0.3: R7.1 54.95,40 56,40 ; Q2.4 56,41.505 56,40 ; Q3.3 56,40 ; TP2.1 57.65,40 56,40
NetQ2_5: Q2.5 Q2.6 Q2.7 Q2.8 R10.1 R11.1 R12.1
NetQ3_1: Q3.1 R9.2 | length 3.4
  Top Layer w0.3: R9.2 54.421,35.3 55.05,35.929 Q3.1
NetQ4_2: Q4.2 U3.15 | length 66.5
  Top Layer w0.3: Q4.2 29.4,49.065 v1(29.4,47.2) ; U3.15 63.378,29.478 70,36.1 70,44.117 v1(68.095,46.022)
  Bottom Layer w0.3: v1(29.4,47.2) 30.4,46.2 32.5,46.2 37.2,50.9 63.217,50.9 v1(68.095,46.022)
NetQ4_4: Q4.4 U3.14 | length 65.1
  Top Layer w0.3: v1(31.9,47.1) 31.9,49.095 Q4.4 ; U3.14@64.6,28.136 U3.14 64.648,29.648 70.654,35.654 70.654,45.096 v1(69.5,46.25)
  Bottom Layer w0.3: v1(31.9,47.1) 31.9,47.6 35.8,51.5 64.25,51.5 v1(69.5,46.25)
NetQ5_2: Q5.2 U3.13 | length 24.1
  Top Layer w0.3: U3.13 65.918,29.818 71.351,35.251 71.351,46.022 69.365,48.008 Q5.2
NetQ5_4: Q5.4 U3.12 | length 23
  Top Layer w0.3: U3.12 67.188,30.193 71.905,34.91 Q5.4
NetR1_1: R1.1 R5.2 U1.4 | length 5.8
  Top Layer w0.3: R1.1 12.429,35.85 R5.2 ; R5.2@15.2,35.85 U1.4
NetR9_1: R9.1 TP1.1 U2.3 | length 24.9
  Top Layer w0.3: U2.3 39.135,26.365 38.9,26.6 38.9,32.6 41.6,35.3 R9.1 51.05,32.95 TP1.1
pads on no net: U3.7 U3.9 U3.10 U3.11

## Polygon pours and split planes (outlines as drawn)
GND on Top Layer "Bottom Layer-No Net" (solid, remove dead copper, pour order 12): 0.5,59.5 99.5,59.5 99.5,43 0.5,43
12V on Top Layer "Bottom Layer-No Net" (solid, remove dead copper, pour order 8): 17.25,14.75 0.5,14.75 0.5,42.75 49,42.75 55,42.75 55,40 52,40 51.75,39.75 51.75,37.05 51.75,36.5 33.4,36.5 33.4,34.25 17.75,34.25 17.25,34.75 17.25,36.75 11.5,36.75 11.5,24.366 11.666,24.2 17.25,24.2
5V on Top Layer "Bottom Layer-No Net" (solid, remove dead copper, pour order 10): 99.5,42.75 99.5,0.5 0.5,0.5 0.5,42.75
GND on Bottom Layer "Bottom Layer-No Net" (solid, remove dead copper, pour order 0): 0.5,59.5 99.5,59.5 99.5,0.5 0.5,0.5

## Other copper
Top Layer:
  rectangle net GND: 20.2,33 23.079,34.199
  rectangle net GND: 12,24.85 22.75,30.1
  rectangle net GND: 21.975,24.85 27,34.1
  rectangle net NetP2_1: 81.8,54.3 83.4,57.3
  rectangle net NetP2_1: 61.8,54.2 63.3,57.2
  rectangle net NetP2_1: 21.7,54.2 23.3,57.5
  rectangle net NetP2_1: 41.9,54.2 43.4,57.1
  rectangle net NetQ2_5: 47.1,47.1 56.8,49.2
  rectangle net NetQ2_5: 46.2,49.2 56.8,50.7
  rectangle net NetP2_1: 21.7,57 83.4,59.5
  rectangle net NetP2_1: 45.5,51 54.5,59.5
  rectangle net NetC5_1: 27.4,24.8 33.4,34.1
  rectangle net GND: 58.9,22.8 60.5,25.2
  rectangle net GND: 40.2,30.7 42.75,32.3
  rectangle net GND: 50.3,23.3 52.6,27.2
  rectangle net GND: 43.6,22.3 45.4,23.7
  rectangle net GND: 12,30 16.8,31.5
  pour cut-out: 20.2,35.5 29.741,35.5 29.741,33.7 21.975,33.7 21.975,30.1 20.2,30.1
Bottom Layer:
  pour cut-out: 20,37.6 29.7,37.6 29.7,33.7 22,33.7 22,30.1 20,30.1
  pour cut-out: 14.25,32.838 14.25,30.55 17.016,27.784 24.6,27.784 24.6,29.75 23.6,29.75 22.6,28.554 17.846,28.554 15.6,30.8 15.6,32.838

## Silkscreen, mask and mechanical layers (free items; w line width, h text height)
Top Overlay:
  lines w0.254: 31.9,19.08 38.75,19.08 38.75,26.937 31.9,26.937 ; 64.5,12.12 53.5,12.12 53.5,19.977 64.5,19.977 ; 11.75,22.25 11.75,25 20.25,25 20.25,22.25 ; 11.75,22.25 20.25,22.25 ; 11.75,22.25 11.75,19.5 20.25,19.5 20.25,22.25
  text "Falk Kyburz" at 72,34.5 h1.2
  text "SYS-P IR-Sensor" at 71.903,32.35 h1.2
  text "Dezember 2017" at 72,30.25 h1.2
  text "5V" at 32.5,24.5 h1.52
  text "12V" at 12.429,22.873 h1.52
  text "VCC" at 32.5,22.25 h1.52
  text "5VEX" at 2.7,22.1 h2
  text "GND" at 90.6,21.4 h2
  text "5V" at 13.6,20.1 h1.52
  text "5VEX" at 32.5,19.8 h1.52
  text "GND" at 55.9,17.9 h1.52
  text "PULL" at 54.75,15.5 h1.52
  text "5V" at 57.5,12.85 h1.52
Mechanical 1:
  the board outline again, w0

## Text inside footprints (layer, text, board x,y; h text height)
1: Top Overlay "Interstaatliche Hochschule" at 72.198,42.302 h2.25; Top Overlay "für Technik Buchs" at 72.202,40.404 h2.25; Top Overlay "FHO Fachhochschule Ostschweiz" at 72.202,37.539 h1.88; Top Overlay "NTB" at 72.198,44.933 h4.87; Top Overlay "Interstaatliche Hochschule" at 72.198,42.302 h2.25; Top Overlay "für Technik Buchs" at 72.202,40.404 h2.25; Top Overlay "FHO Fachhochschule Ostschweiz" at 72.202,37.539 h1.88; Top Overlay "NTB" at 72.198,44.933 h4.87